# EAGLE board tvp3 (EAGLE 8.1.1)
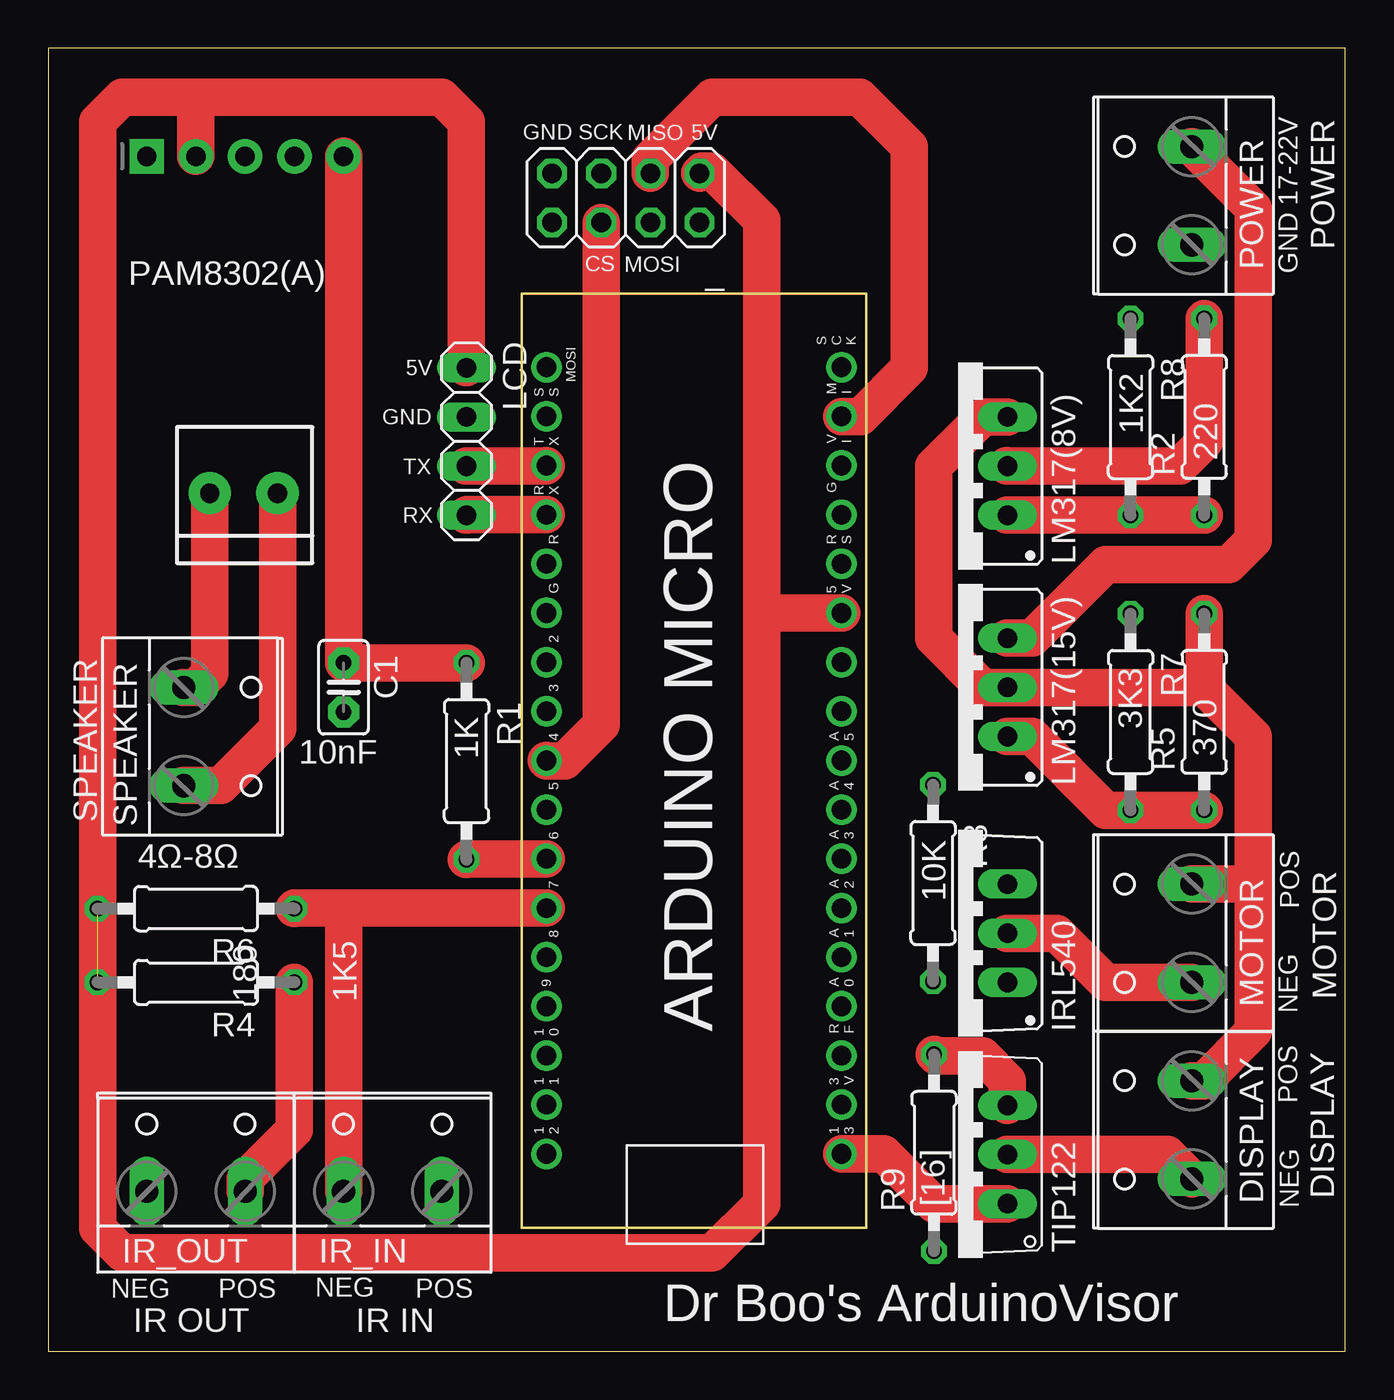
[diagram p0: board, top side]
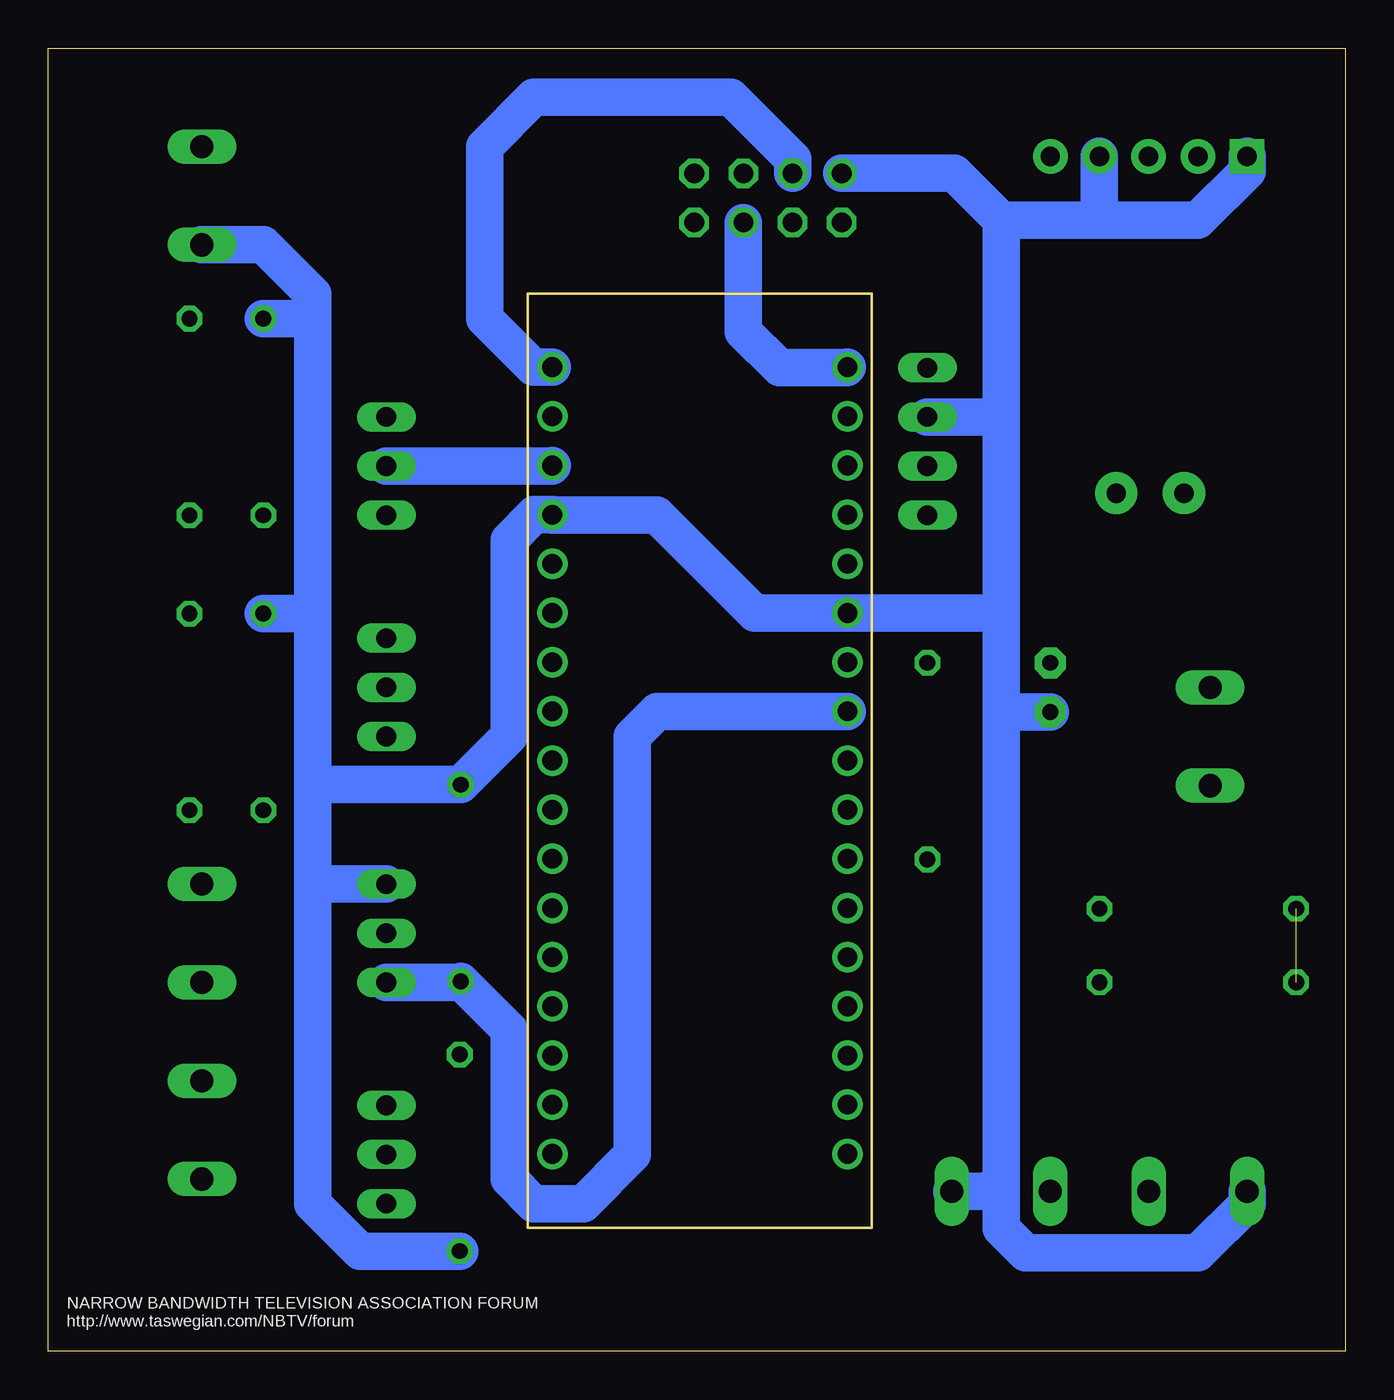
[diagram p1: board, bottom side, seen from below]

Size 66.98 x 67.3 mm. Coordinates in mm from the lower left corner, seen from the top.
Outline: 0,0 66.98,0 66.98,67.3 0,67.3 0,0
Copper layers (1*16): Top 0.035mm / dielectric 1.5mm / Bottom 0.035mm
Design rules "default *": minimum track width 10mil, minimum drill 24mil, track to track 20mil, track to pad 20mil, pad to pad 20mil, via to via 20mil, smd to smd 8mil, copper to edge 0mil, drill to drill 8mil, minimum pad ring 10mil, minimum via ring 8mil, stop-mask expansion 4mil, vias tented up to drill 0mil, thermal gap 10mil

## Footprints (pad centres in the part's own frame; a part is rotated, then mirrored left to right if it is on the bottom)
2X04 = drill 1.016 octagon: 1 -3.81,-1.27; 2 -3.81,1.27; 3 -1.27,-1.27; 4 -1.27,1.27; 5 1.27,-1.27; 6 1.27,1.27; 7 3.81,-1.27; 8 3.81,1.27
C2.5-2 = drill 0.813 pad 1.6 octagon: 1 -1.27,0; 2 1.27,0
W237-132 = drill 1.194 long: 1 -2.54,-0.635; 2 2.54,-0.635
TO220BV = drill 1.016 long: D 0,-2.54; G -2.54,-2.54; S 2.54,-2.54
1X05_ROUND_70 = drill 1 pad 1.778 square: 1 -5.08,0 | drill 1 pad 1.778: 2 -2.54,0; 3 0,0; 4 2.54,0; 5 5.08,0
1X04 = drill 1.016 long: 1 -3.81,0; 2 -1.27,0; 3 1.27,0; 4 3.81,0
317TS = drill 1.016 long: 1 -2.54,-2.54; 2 0,-2.54; 3 2.54,-2.54
ARDUINO_MICRO = drill 1.016 pad 1.575: 3V3 6.35,1.27; +5V 31.75,1.27; A0 11.43,1.27; A1 13.97,1.27; A2 16.51,1.27; A3 19.05,1.27; A4 21.59,1.27; A5 24.13,1.27; D2 29.21,16.51; D3 26.67,16.51; D4 24.13,16.51; D5 21.59,16.51; D6 19.05,16.51; D7 16.51,16.51; D8 13.97,16.51; D9 11.43,16.51; D10 8.89,16.51; D11 6.35,16.51; D12 3.81,16.51; D13 3.81,1.27; GND 31.75,16.51; GND. 36.83,1.27; MISO] 41.91,1.27; MOSI 44.45,16.51; NC 26.67,1.27; NC. 29.21,1.27; REF 8.89,1.27; RST 34.29,16.51; RST. 34.29,1.27; RX1 36.83,16.51; SCK 44.45,1.27; SS 41.91,16.51; TX1 39.37,16.51; VIN 39.37,1.27
0207/10 = drill 0.813 octagon: 1 -5.08,0; 2 5.08,0
TO220V = drill 1.016 long: 1 -2.54,-2.54; 2 0,-2.54; 3 2.54,-2.54
TERMBLOCK_1X2-3.5MM = drill 1 pad 2.184: 1 1.8,0; 2 -1.7,0

## Placement (x,y rotation side)
_  [2X04]  29.82,59.57 180 top
C1  10nF  [C2.5-2]  15.24,34.29 270 top
DISPLAY  [W237-132]  58.42,11.43 90 top
IR_IN  [W237-132]  17.78,8.89 0 top
IR_OUT  [W237-132]  7.62,8.89 0 top
IRL540  IRF540  [TO220BV]  46.99,21.59 90 top
JP1  0  [1X05_ROUND_70]  10.16,61.72 0 top
LCD  [1X04]  21.59,46.99 270 top
LM317(8V)  0  [317TS]  46.99,45.72 90 top
LM317(15V)  0  [317TS]  46.99,34.29 90 top
MOTOR  [W237-132]  58.42,21.59 90 top
PCB2  ARDUINO_MICRO  [ARDUINO_MICRO]  42.23,6.38 90 top
POWER  [W237-132]  58.42,59.69 90 top
R1  1K  [0207/10]  21.59,30.48 270 top
R2  330  [0207/10]  59.69,48.26 90 top
R3  10K  [0207/10]  45.68,24.18 270 top
R4  180  [0207/10]  7.62,19.05 180 top
R5  240  [0207/10]  59.69,33.02 90 top
R6  1K5  [0207/10]  7.62,22.86 180 top
R7  2K7  [0207/10]  55.88,33.02 270 top
R8  1K8  [0207/10]  55.88,48.26 270 top
R9  16  [0207/10]  45.74,10.24 90 top
SPEAKER  [W237-132]  7.62,31.75 270 top
TIP122  [TO220V]  46.99,10.16 90 top
X1  0  [TERMBLOCK_1X2-3.5MM]  10.03,44.32 0 top

## Library data of the parts
_ LCD = pinhead
C1 = capacitor-wima
DISPLAY IR_IN IR_OUT MOTOR POWER SPEAKER = con-wago-508; OC_FARNELL: unknown; OC_NEWARK: unknown
IRL540 = transistor-power
JP1 X1 = microbuilder
LM317(8V) LM317(15V) = v-reg
PCB2 = E14_Arduino_revC 2 boo
R1-R9 = rcl
TIP122 = transistor-neu-to92

## Nets
8V: LM317(8V).2 PCB2.VIN R2.2
15V: DISPLAY.2 LM317(8V).3 LM317(15V).2 MOTOR.2 R5.2
+5V: _.1 JP1.2 LCD.1 PCB2.+5V R4.2 R6.2
CS: _.6 PCB2.D4
GND: _.7 C1.2 IR_IN.2 IR_OUT.1 IRL540.S JP1.1 JP1.4 LCD.2 PCB2.GND PCB2.GND. POWER.1 R3.1 R7.1 R8.1 R9.1
IR_IN: IR_IN.1 PCB2.D7 R6.1
IR_OUT: IR_OUT.2 R4.1
LEDOUT: DISPLAY.1 TIP122.2
LEDS: PCB2.D13 TIP122.1
MISO: _.3 PCB2.MISO]
MOSI: _.4 PCB2.MOSI
MOTOR_NEG: IRL540.D MOTOR.1
MOTOR_PWM: IRL540.G PCB2.D3 R3.2
N$1: LM317(15V).1 R5.1 R7.2
N$2: R9.2 TIP122.3
N$4: LM317(8V).1 R2.1 R8.2
RX: LCD.4 PCB2.RX1
SCK: _.5 PCB2.SCK
SOUND: PCB2.D6 R1.2
SPK: C1.1 JP1.5 R1.1
SPK1: SPEAKER.2 X1.1
SPK2: SPEAKER.1 X1.2
TX: LCD.3 PCB2.TX1
VCC: LM317(15V).3 POWER.2

## Tracks (layer width: path | path; a pad name or v marks a point on that pad's centre or on a via)
8V
  Top 1.93: 49.5,45.75 LM317(8V).2 58.42,45.72 59.69,46.99 R2.2
  Bottom 1.93: LM317(8V).2 40.99,45.72 PCB2.VIN
15V
  Top 1.93: DISPLAY.2 59.69,13.97 62.23,16.51 62.23,24.13 | 62.23,24.13 62.23,31.75 59.69,34.29 | 59.69,34.29 LM317(15V).2 48.26,34.29 45.72,36.83 45.72,45.72 48.26,48.26 LM317(8V).3 | R5.2 59.69,34.29 | MOTOR.2 62.23,24.13
+5V  (1 unrouted)
  Top 1.93: PCB2.+5V 36.83,38.13 | 36.83,38.13 36.83,7.62 34.29,5.08 3.81,5.08 2.54,6.35 R4.2 2.54,63.5 3.81,64.77 7.62,64.77 | 7.62,64.77 20.32,64.77 21.59,63.5 LCD.1 | JP1.2 7.62,64.77 | 36.83,38.13 36.83,58.42 34.29,60.96 33.75,60.96 _.1
CS
  Top 1.93: _.6 28.55,32.36 26.67,30.48 25.75,30.48 PCB2.D4
GND
  Bottom 1.93: 17.78,38.1 17.78,48.26 | 17.78,33.02 17.78,38.1 | JP1.1 5.08,60.96 7.62,58.42 12.7,58.42 | 12.7,58.42 17.78,58.42 | _.7 20.2,60.84 17.78,58.42 | JP1.4 12.7,58.42 | 17.78,48.26 17.78,58.42 | LCD.2 17.78,48.26 | 17.78,38.1 17.81,38.13 PCB2.GND 30.51,38.13 35.56,43.18 40.93,43.18 PCB2.GND. 41.88,43.21 43.18,41.91 43.18,31.77 R3.1 53.29,29.26 53.34,29.21 | C1.2 17.78,33.02 | R9.1 50.88,5.16 53.34,7.62 53.34,24.13 | 53.34,38.1 53.34,53.34 | 53.34,29.21 53.34,24.13 | 53.34,29.21 53.34,38.1 | 53.34,53.34 53.34,54.61 55.88,57.15 POWER.1 | R8.1 53.34,53.34 | R7.1 53.34,38.1 | IRL540.S 53.34,24.13 | IR_OUT.1 5.08,7.62 7.62,5.08 16.51,5.08 17.78,6.35 17.78,8.89 | 17.78,8.89 17.78,33.02 | IR_IN.2 18.41,8.25 17.78,8.89
IR_IN
  Top 1.93: 15.24,22.89 PCB2.D7 | 15.24,22.89 12.73,22.89 R6.1 | IR_IN.1 15.24,22.89
IR_OUT
  Top 1.93: IR_OUT.2 10.16,8.89 12.7,11.43 R4.1
LEDOUT
  Top 1.93: TIP122.2 57.79,10.16 DISPLAY.1
LEDS
  Top 1.93: PCB2.D13 43.15,10.19 45.72,7.62 TIP122.1
MISO
  Top 1.93: PCB2.MISO] 41.94,48.29 44.45,50.8 44.45,62.23 41.91,64.77 34.29,64.77 31.09,61.57 _.3
MOSI
  Bottom 1.93: _.4 31.09,52.68 29.21,50.8 25.75,50.8 PCB2.MOSI
MOTOR_NEG
  Top 1.93: IRL540.D 52.07,21.59 54.61,19.05 MOTOR.1
MOTOR_PWM
  Bottom 1.93: PCB2.D3 35.53,33.05 36.83,31.75 36.83,10.16 39.37,7.62 41.91,7.62 43.18,8.89 43.18,16.6 R3.2 | R3.2 45.63,19.05 | IRL540.G 45.74,19.05 R3.2
N$1
  Top 1.93: R5.1 R7.2 54.61,27.94 50.8,31.75 LM317(15V).1
N$2
  Top 1.93: TIP122.3 49.53,13.97 48.26,15.24 45.82,15.24 R9.2
N$4
  Top 1.93: LM317(8V).1 R8.2 R2.1
RX
  Top 1.422: LCD.4 21.62,43.21
  Top 1.93: PCB2.RX1 21.62,43.21 LCD.4
SCK
  Bottom 1.93: PCB2.SCK 41.94,50.83 44.45,53.34 44.45,62.23 41.91,64.77 31.75,64.77 28.55,61.57 _.5
SOUND
  Top 1.93: PCB2.D6 21.62,25.43 R1.2
SPK
  Top 1.93: JP1.5 C1.1 R1.1
SPK1
  Top 1.93: X1.1 11.83,32.15 8.89,29.21 SPEAKER.2
SPK2
  Top 1.93: X1.2 8.33,35 7.62,34.29 SPEAKER.1
TX
  Top 1.422: 21.62,45.75 LCD.3
  Top 1.93: LCD.3 25.69,45.72 PCB2.TX1
VCC
  Top 1.93: POWER.2 62.23,59.05 62.23,41.91 60.96,40.64 54.61,40.64 50.8,36.83 LM317(15V).3

## Text on the board
tNames: GND | SCK | MISO | 5V | 17-22V | POWER | CS | MOSI | GND | PAM8302(A) | 5V | GND | 1K2 | TX | 220 | RX | 3K3 | 370 | 10nF | 1K | SPEAKER | 4Ω-8Ω | 10K | POS | 180 | 1K5 | MOTOR | NEG | ARDUINO MICRO | POS | DISPLAY | [16] | NEG | NEG | POS | NEG | POS | IR OUT | IR IN | Dr Boo's ArduinoVisor
bNames: NARROW BANDWIDTH TELEVISION ASSOCIATION FORUM / http://www.taswegian.com/NBTV/forum